# Allegro board LinkingInterfaceV1.3.brd
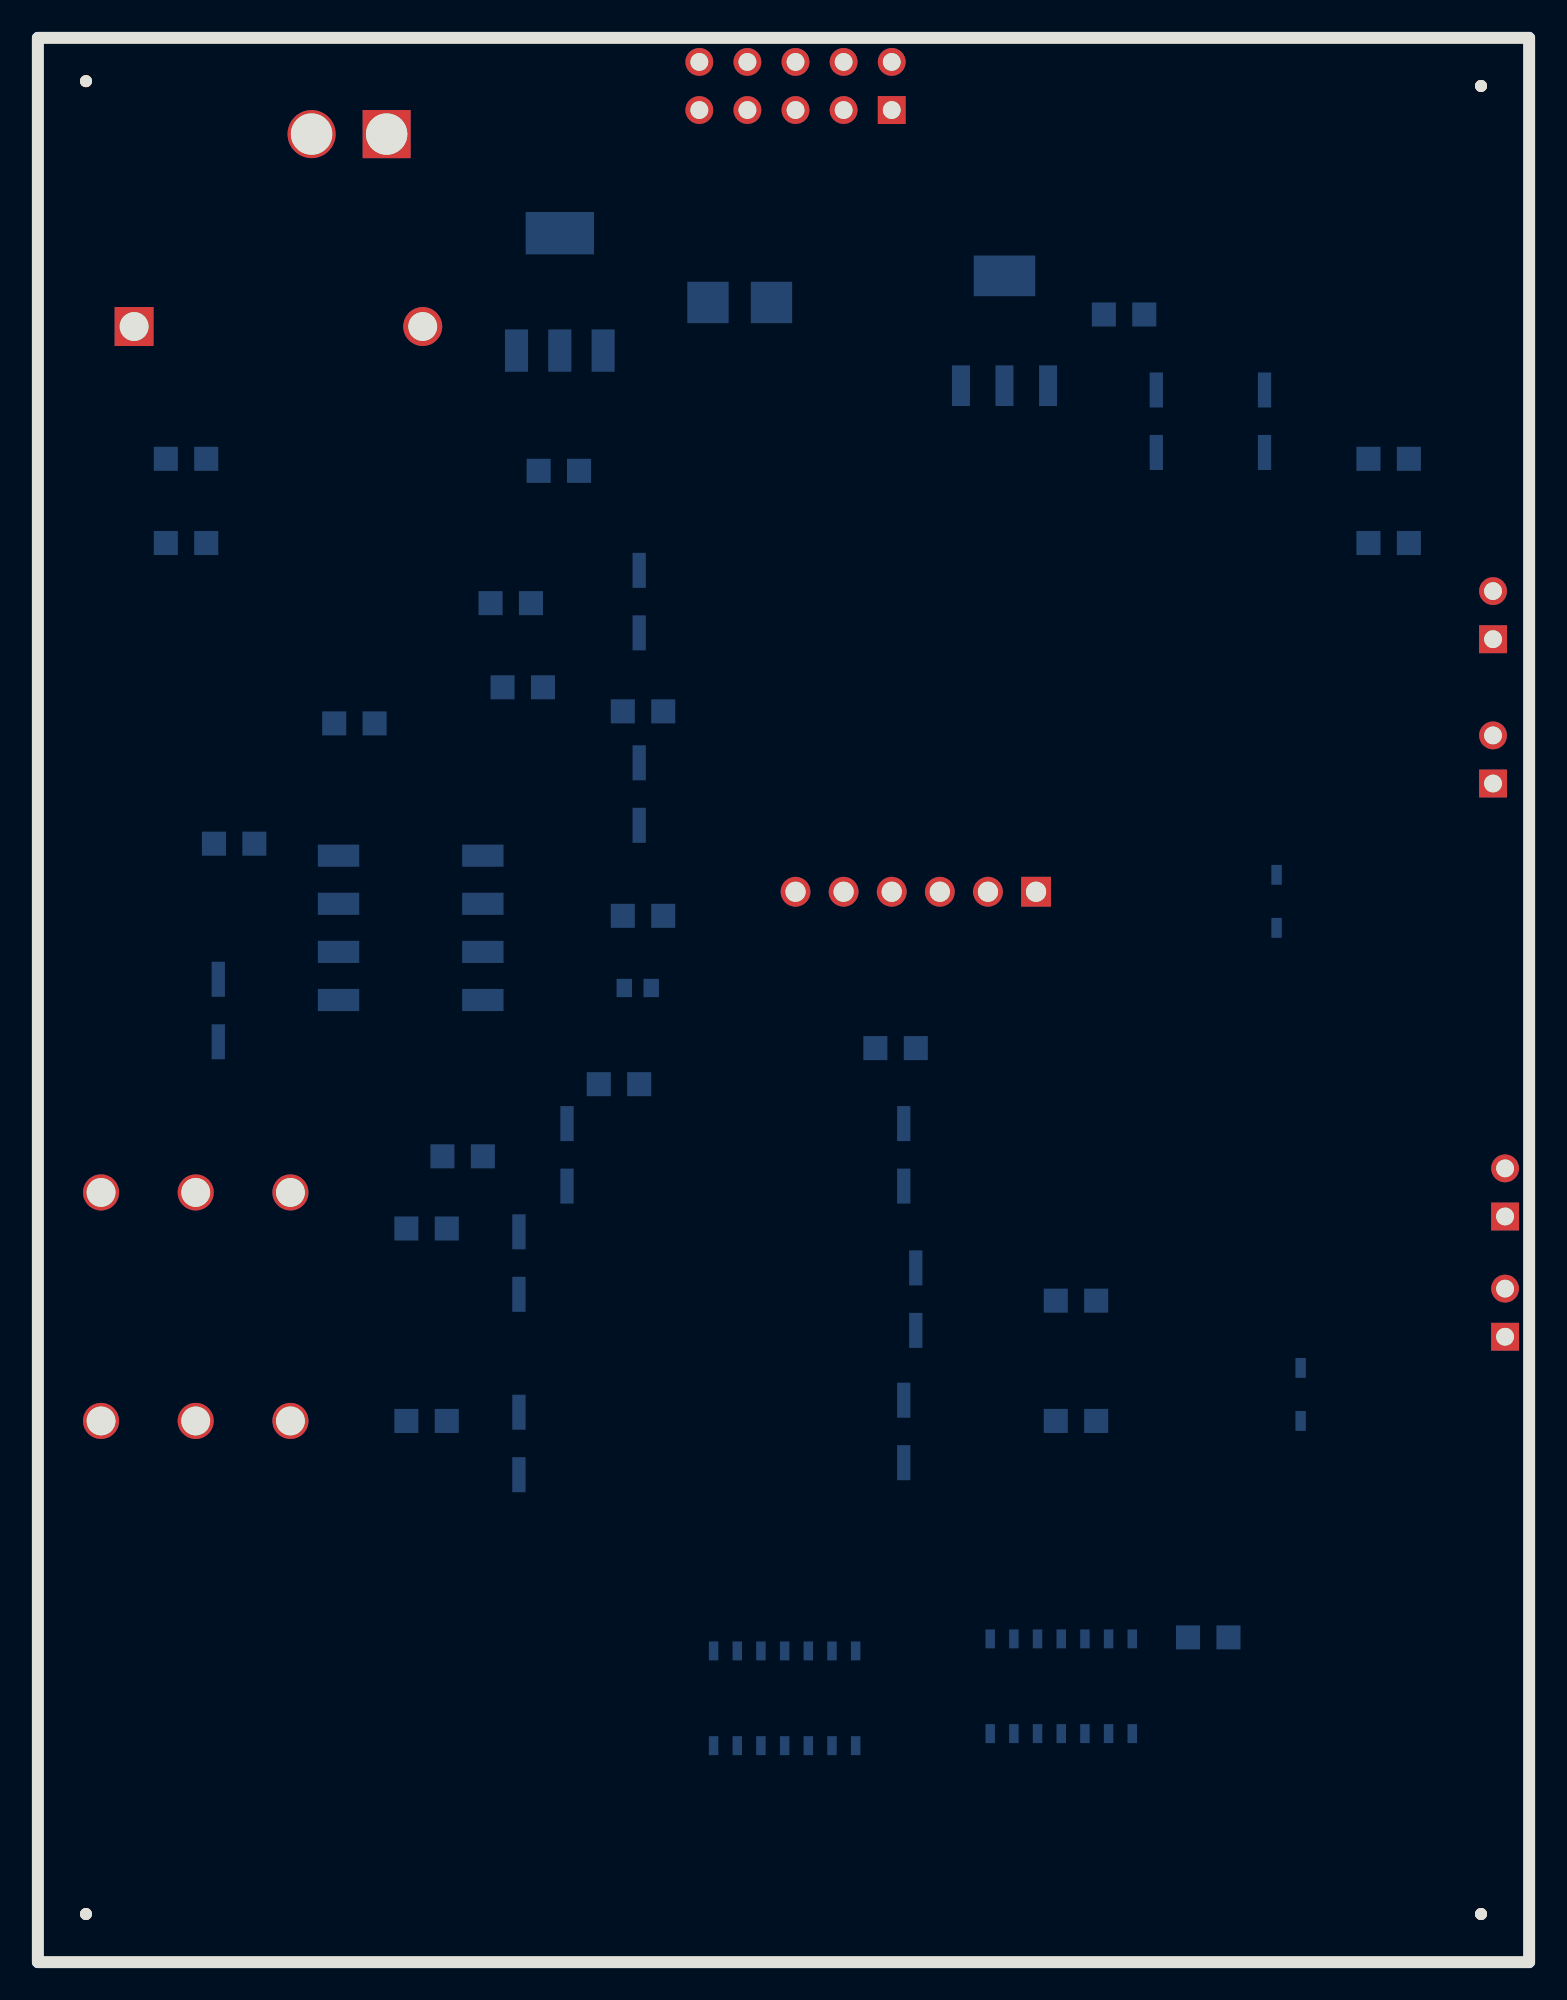
[diagram p0: board, top side]
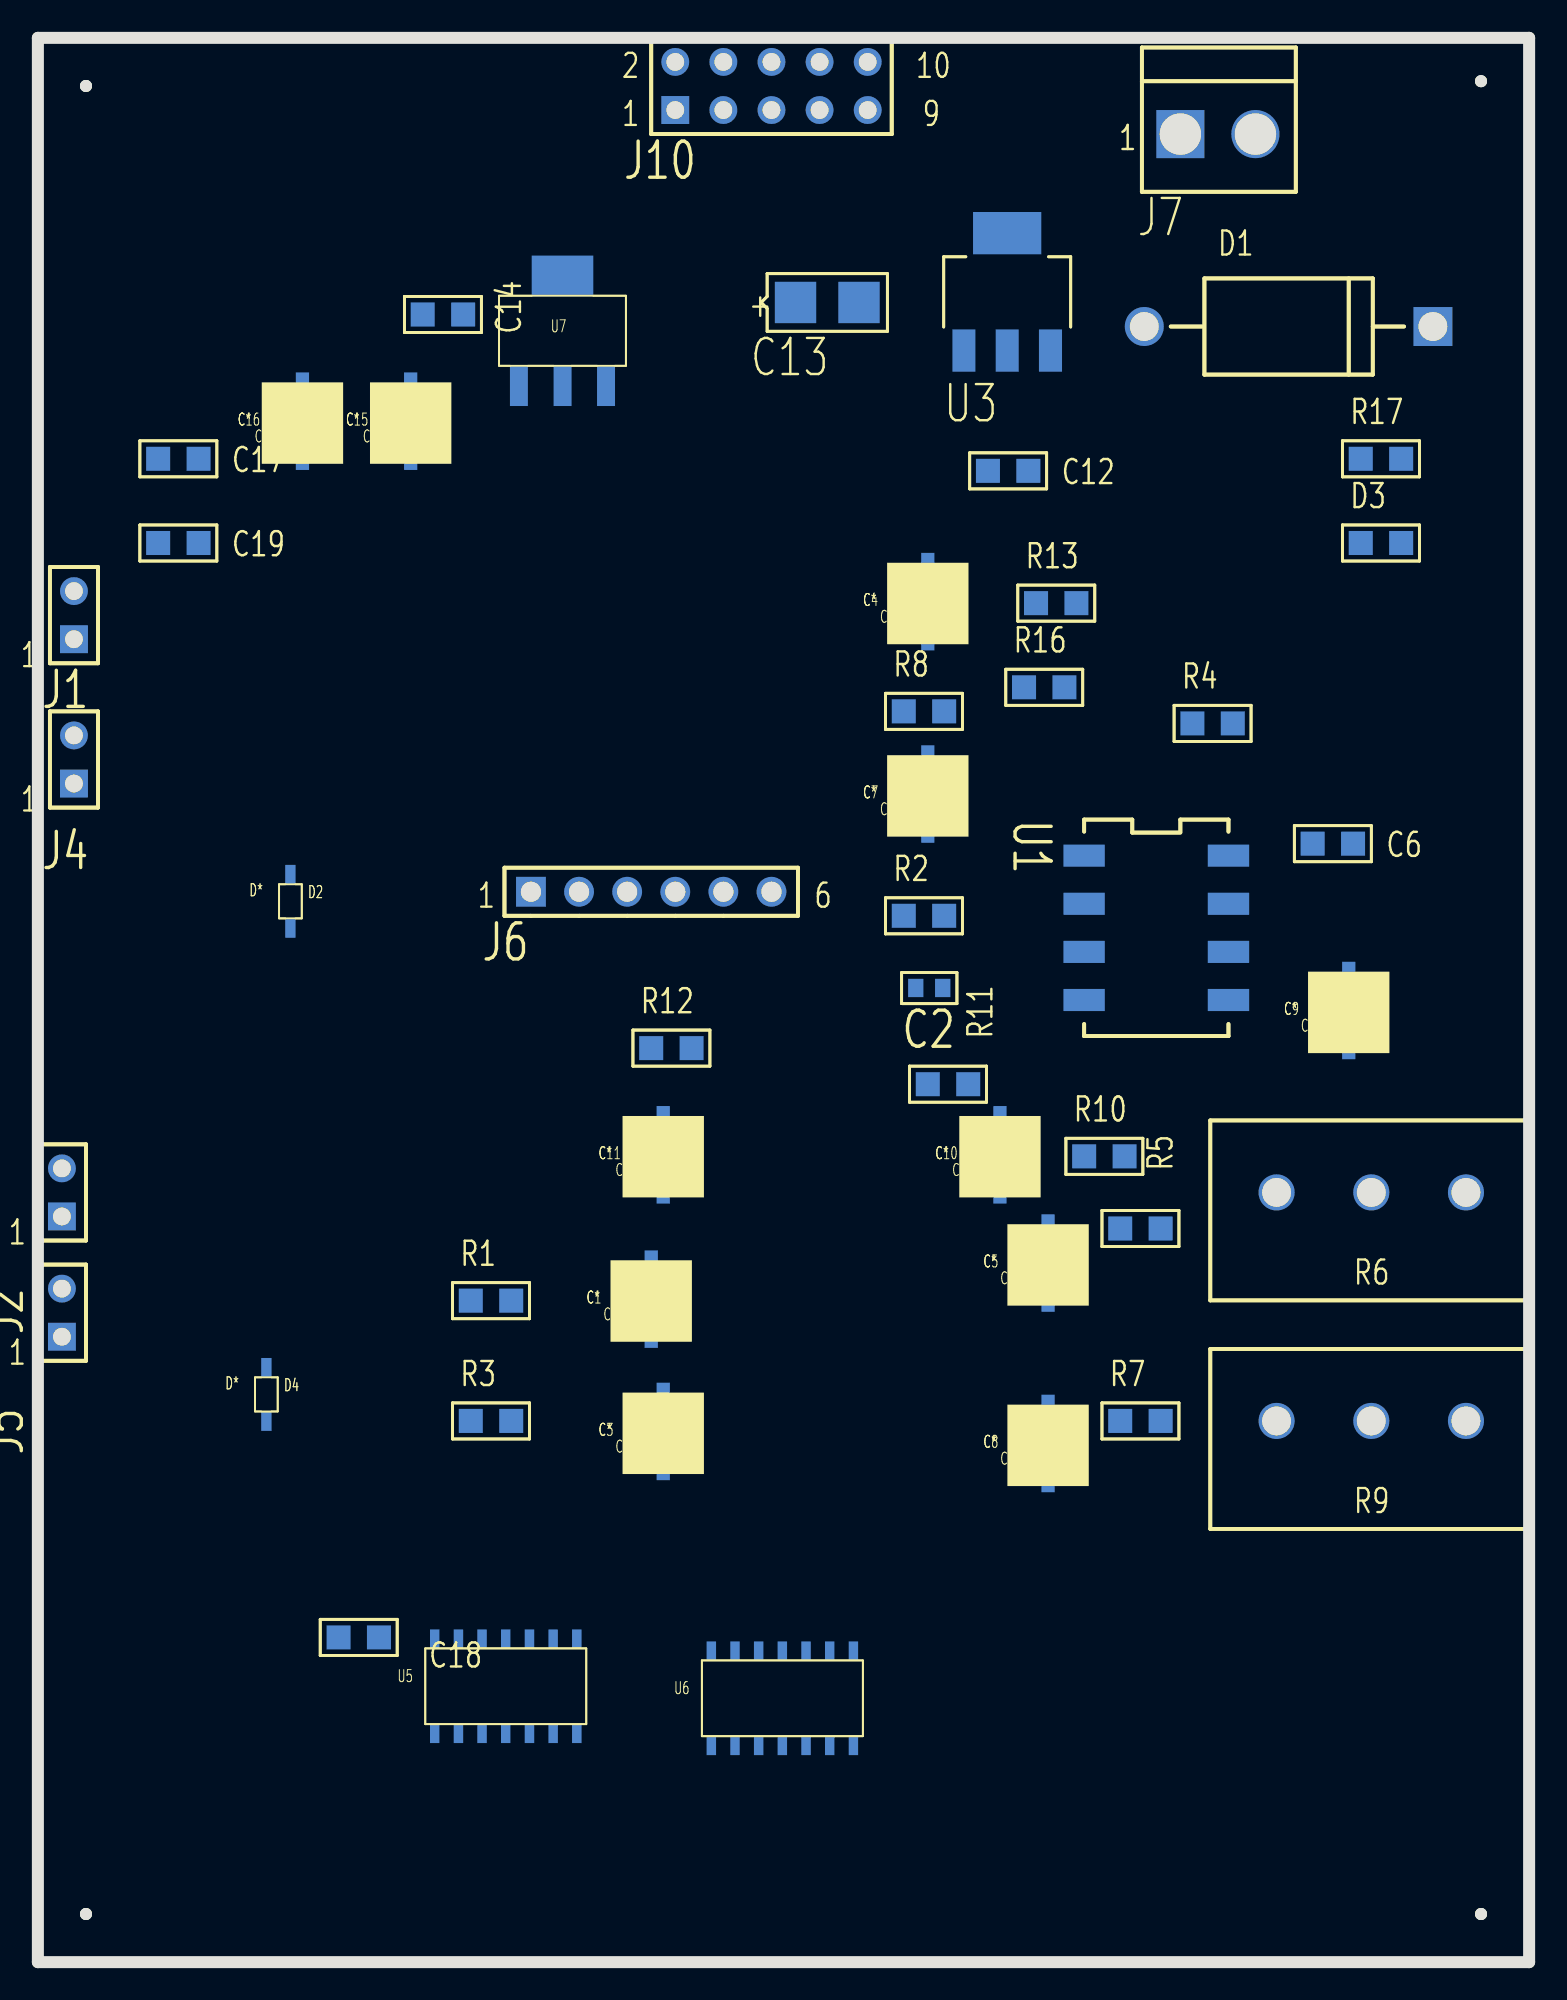
[diagram p1: board, bottom side, seen from below]

Outline 78.74 x 101.6 mm; copper layers: TOP, BOTTOM. Coordinates in mm from the lower left corner of the outline.
Outline path: 0,101.6 78.74,101.6 ; 0,101.6 78.74,101.6 ; 0,101.6 0,0 ; 0,101.6 0,0 ; 78.74,101.6 78.74,0 ; 78.74,101.6 78.74,0 ; 0,0 78.74,0 ; 0,0 78.74,0

## Placement (name value [footprint] x y rotation side)
C1  10uF  [1_UF_CAP]  46.36 33.65 180 bottom
C2  100pF  [SMC0603]  32.39 51.43 180 bottom
C3  10uF  [1_UF_CAP]  45.72 26.67 180 bottom
C4  10uF  [1_UF_CAP]  31.75 70.48 180 bottom
C5  10uF  [1_UF_CAP]  25.4 35.56 180 bottom
C6  100nF  [SMC0805]  11.43 59.05 180 bottom
C7  1uF  [1_UF_CAP]  31.75 60.33 180 bottom
C8  10uF  [1_UF_CAP]  25.4 26.04 180 bottom
C9  4.7uF  [1_UF_CAP]  9.53 48.89 180 bottom
C10  10uF  [1_UF_CAP]  27.94 41.27 180 bottom
C11  10uF  [1_UF_CAP]  45.72 41.27 180 bottom
C12  470nF  [SMC0805]  28.58 78.74 180 bottom
C13  22uF/Tant  [EIAB_SMCT3528_12]  38.74 87.63 180 bottom
C14  100nF  [SMC0805]  58.42 86.99 180 bottom
C15  10uF  [1_UF_CAP]  59.06 80.01 180 bottom
C16  10uF  [1_UF_CAP]  64.77 80.01 180 bottom
C17  100nF  [SMC0805]  72.39 79.37 180 bottom
C18  100nF  [SMC0805]  62.87 17.14 180 bottom
C19  100nF  [SMC0805]  72.39 74.93 180 bottom
D1  SB1245  [DAX600_60D]  20.32 86.36 180 bottom
D2  1N4148  [1N4148_SOD523]  65.41 54.61 180 bottom
D3  RED  [SMR0805]  8.89 74.93 180 bottom
D4  1N4148  [1N4148_SOD523]  66.68 28.58 180 bottom
J1  HEADER 2  [BLKCON100VHTM2OEW2002]  76.84 69.85 180 bottom
J2  HEADER 2  [BLKCON100VHTM2OEW2002]  77.47 39.37 180 bottom
J4  HEADER 2  [BLKCON100VHTM2OEW2002]  76.84 62.23 180 bottom
J5  HEADER 2  [BLKCON100VHTM2OEW2002]  77.47 33.02 180 bottom
J6  HEADER 6  [BLKCON100VHTM1SQSW1006]  52.71 56.52 180 bottom
J7  0.156 VH  [BLKCON156_VHTM1SQ_SW156_2]  18.42 96.52 180 bottom
J10  HEADER 10  [BLKCON100VHTM2OEW20010]  45.09 97.79 180 bottom
NOREF  -  [unnamed]  2.54 2.54 180 bottom
NOREF#2  -  [unnamed]  2.54 99.31 180 bottom
NOREF#3  -  [unnamed]  76.2 99.06 180 bottom
NOREF#4  -  [unnamed]  76.2 2.54 180 bottom
R1  51k  [SMR0805]  55.88 34.92 180 bottom
R2  51k  [SMR0805]  33.02 55.24 180 bottom
R3  51k  [SMR0805]  55.88 28.58 180 bottom
R4  51k  [SMR0805]  17.78 65.4 180 bottom
R5  7.5k  [SMR0805]  21.59 38.73 180 bottom
R6  10k  [P60-20748]  13.34 40.64 180 bottom
R7  7.5k  [SMR0805]  21.59 28.58 180 bottom
R8  51k  [SMR0805]  33.02 66.04 180 bottom
R9  10k  [P60-20748]  13.34 28.58 180 bottom
R10  7.5k  [SMR0805]  23.5 42.55 180 bottom
R11  10k  [SMR0805]  31.75 46.36 180 bottom
R12  51k  [SMR0805]  46.36 48.26 180 bottom
R13  51k  [SMR0805]  26.04 71.76 180 bottom
R16  51k  [SMR0805]  26.67 67.31 180 bottom
R17  120  [SMR0805]  8.89 79.37 180 bottom
U1  TL072  [DIP100B8W300L450]  23.5 58.42 270 bottom
U3  LM2940 / SOT223  LDO  [SOT223_1234]  29.85 85.09 180 bottom
U5  74HC08  [74HC0]  57.79 12.07 180 bottom
U6  74HC04  [74HC0]  43.18 11.43 180 bottom
U7  LM2936/SO_5  [LM2936_SOT]  53.34 83.18 180 bottom

## Library data of the parts
C1 C3 C7 C11 = CAPACITOR POL
C2 C6 C12 C14 C17-C19 = C NP
C4 C5 C8-C10 C15 C16 = CAP POL
C13 = C POL
D1 = DIODE SCHOTTKY_0
D2 D4 = 1N4148
D3 = LED
J1 J2 J4 J5 = HEADER 2
J6 = HEADER 6
J7 = HEADER 2_4
J10 = HEADER 10
R1-R5 R7 R8 R10-R13 R16 R17 = RESISTOR
R6 R9 = POT
U1 = TL072_0
U3 = 78L05/TO92_0
U5 = 74HC08_4
U6 = 74HC04_5
U7 = LM2936/SO_13

## Footprints (pads in the part's own frame, mm; a bottom-side part is the same pattern mirrored in y, then rotated)
1_UF_CAP
  rect 0.701x1.849 smd: 1(0,-0.3) 2(0,3)
1N4148_SOD523
  rect 0.551x1.049 smd: 1(0,0) 2(0,2.799)
74HC0
  rect 0.5x1.001 smd: 1(0,0) 2(1.25,0) 3(2.499,0) 4(3.749,0) 5(5.001,0) 6(6.251,0) 7(7.501,0) 8(7.501,5.001) 9(6.251,5.001) 10(5.001,5.001) 11(3.749,5.001) 12(2.499,5.001) 13(1.25,5.001) 14(0,5.001)
BLKCON100VHTM1SQSW1006
  rect 1.575x1.575 hole 1.067: 1(0,0)
  round 1.575 hole 1.067: 2(2.54,0) 3(5.08,0) 4(7.62,0) 5(10.16,0) 6(12.7,0)
BLKCON100VHTM2OEW2002
  rect 1.473x1.473 hole 0.94: 1(0,0)
  round 1.473 hole 0.94: 2(0,2.54)
BLKCON100VHTM2OEW20010
  rect 1.473x1.473 hole 0.94: 1(0,0)
  round 1.473 hole 0.94: 2(0,2.54) 3(2.54,0) 4(2.54,2.54) 5(5.08,0) 6(5.08,2.54) 7(7.62,0) 8(7.62,2.54) 9(10.16,0) 10(10.16,2.54)
BLKCON156_VHTM1SQ_SW156_2
  rect 2.54x2.54 hole 2.184: 1(0,0)
  round 2.54 hole 2.184: 2(3.962,0)
DAX600_60D
  round 2.057 hole 1.524: 1(0,0)
  rect 2.057x2.057 hole 1.524: 2(15.24,0)
DIP100B8W300L450
  rect 1.168x2.184 smd: 1(0,0) 2(2.54,0) 3(5.08,0) 4(7.62,0) 5(7.62,7.62) 6(5.08,7.62) 7(2.54,7.62) 8(0,7.62)
EIAB_SMCT3528_12
  rect 2.184x2.184 smd: 1(0,0) 2(3.353,0)
LM2936_SOT
  rect 0.95x2.149 smd: 1(0,0.051) 2(2.301,0.051) 3(4.6,0.051)
  rect 3.251x2.149 smd: 4(2.301,5.85)
P60-20748
  round 1.905 hole 1.524: 1(0,0) 2(5.001,0) 3(10,0)
SMC0603
  rect 0.813x0.965 smd: 1(0,0) 2(1.422,0)
SMC0805
  rect 1.27x1.27 smd: 1(0,0) 2(2.134,0)
SMR0805
  rect 1.27x1.27 smd: 1(0,0) 2(2.134,0)
SOT223_1234
  rect 1.219x2.235 smd: 1(0,0) 2(2.286,0) 3(4.572,0)
  rect 3.607x2.235 smd: 4(2.286,6.198)
unnamed
  round 0.635 hole 3.175 unplated: (0,0)

## Nets
+3.3V: C15.1 C16.1 C17.2(B) C18.2(B) C19.1(A) U5.14(+3.3V) U6.14(+3.3V) U7.3(+3.3V)
+4.5V: C9.1 R13.1 R16.2 R17.2 U1.3(+IN) U1.5(+IN)
+9V: C6.2(B) C13.1(P) C14.2(B) R13.2 U1.8(+9V) U3.3(+9V) U7.1(+9V)
GND: C6.1(A) C9.2 C12.2(B) C13.2(N) C14.1(A) C15.2 C16.2 C17.1(A) C18.1(A) C19.2(B) D3.2(CATHODE) J1.2 J2.2 J4.2 J5.2 J6.2 J6.4 J6.6 J7.2 J10.1 J10.4 J10.6 J10.7 J10.10 R6.3(B) R9.3(B) R11.1 R16.1 U1.4(GND) U3.2(G1) U3.4(G2) U5.7(GND) U6.7(GND) U7.2(GND#2) U7.4(GND#4)
AUDIO_AUX: C7.1 J10.3
AUDIOOUT: C4.2 J10.2
COS: D2.2 D4.2 J10.5
COS_ALLSTAR: D4.1
DTMF_AUDIO: J6.3 R10.2 R11.2
DTMF_TONE_CONFIRMATION: J6.1 R12.2
INHIBIT: J6.5 J10.8
PTT: J10.9 U5.3(Y)
PTT_A: U5.1(A) U6.1(A)
PTT_E: U5.2(B) U5.4(A) U6.3(A)
RX_A: J5.1 R9.2(WIPER)
RX_E: J4.1 R6.2(WIPER)
TX_A: J2.1 R3.2
N88559: C1.1 C2.2(B) C3.1 C11.1 R2.2 U1.2(-IN)
N88575: C2.1(A) C4.1 R2.1 U1.1(OUT)
N89923: C5.1 C8.1 C10.1 R4.2 U1.7(OUT)
N90145: C1.2 R1.1
N90149: C3.2 R3.1
N90849: R4.1 R8.2 U1.6(-IN)
N96497: U5.6(Y)
N134507: C5.2 R5.1
N134567: C10.2 R10.1
N134575: C8.2 R7.1
N134810: R5.2 R6.1(A)
N196050: J1.1 R1.2
N904010: R7.2 R9.1(A)
N908811: C7.2 R8.1
N14521945: C12.1(A) D1.2(CATHODE) U3.1(IN)
N14538770: D1.1(ANODE) J7.1
N14545130: U6.4(Y)
N14547090: U5.5(B) U6.2(Y)
N14548028: D2.1
N14551658: C11.2 R12.1
N145714160: D3.1(ANODE) R17.1

Pads without a net: U5 8 9 10 11 12 13; U6 5 6 8 9 10 11 12 13

## Text on the board
Board Geometry/Soldermask Bottom: SMB
Ref Des/Silkscreen Bottom: SSB
TOP: TOP
Board Geometry/Soldermask Top: SMT
Ref Des/Silkscreen Top: SST
User.5: BOTTOM
User.6: MECH
